# Altium PCB PCB2.PcbDoc
Units mil, origin at the board's own origin, x right, y up, seen from the top; angles counter-clockwise.
Board outline 2625 x 2375 mil, 2 copper layers (Top Layer, Bottom Layer); 14 components, 13 nets, 39 pads, 0 vias.
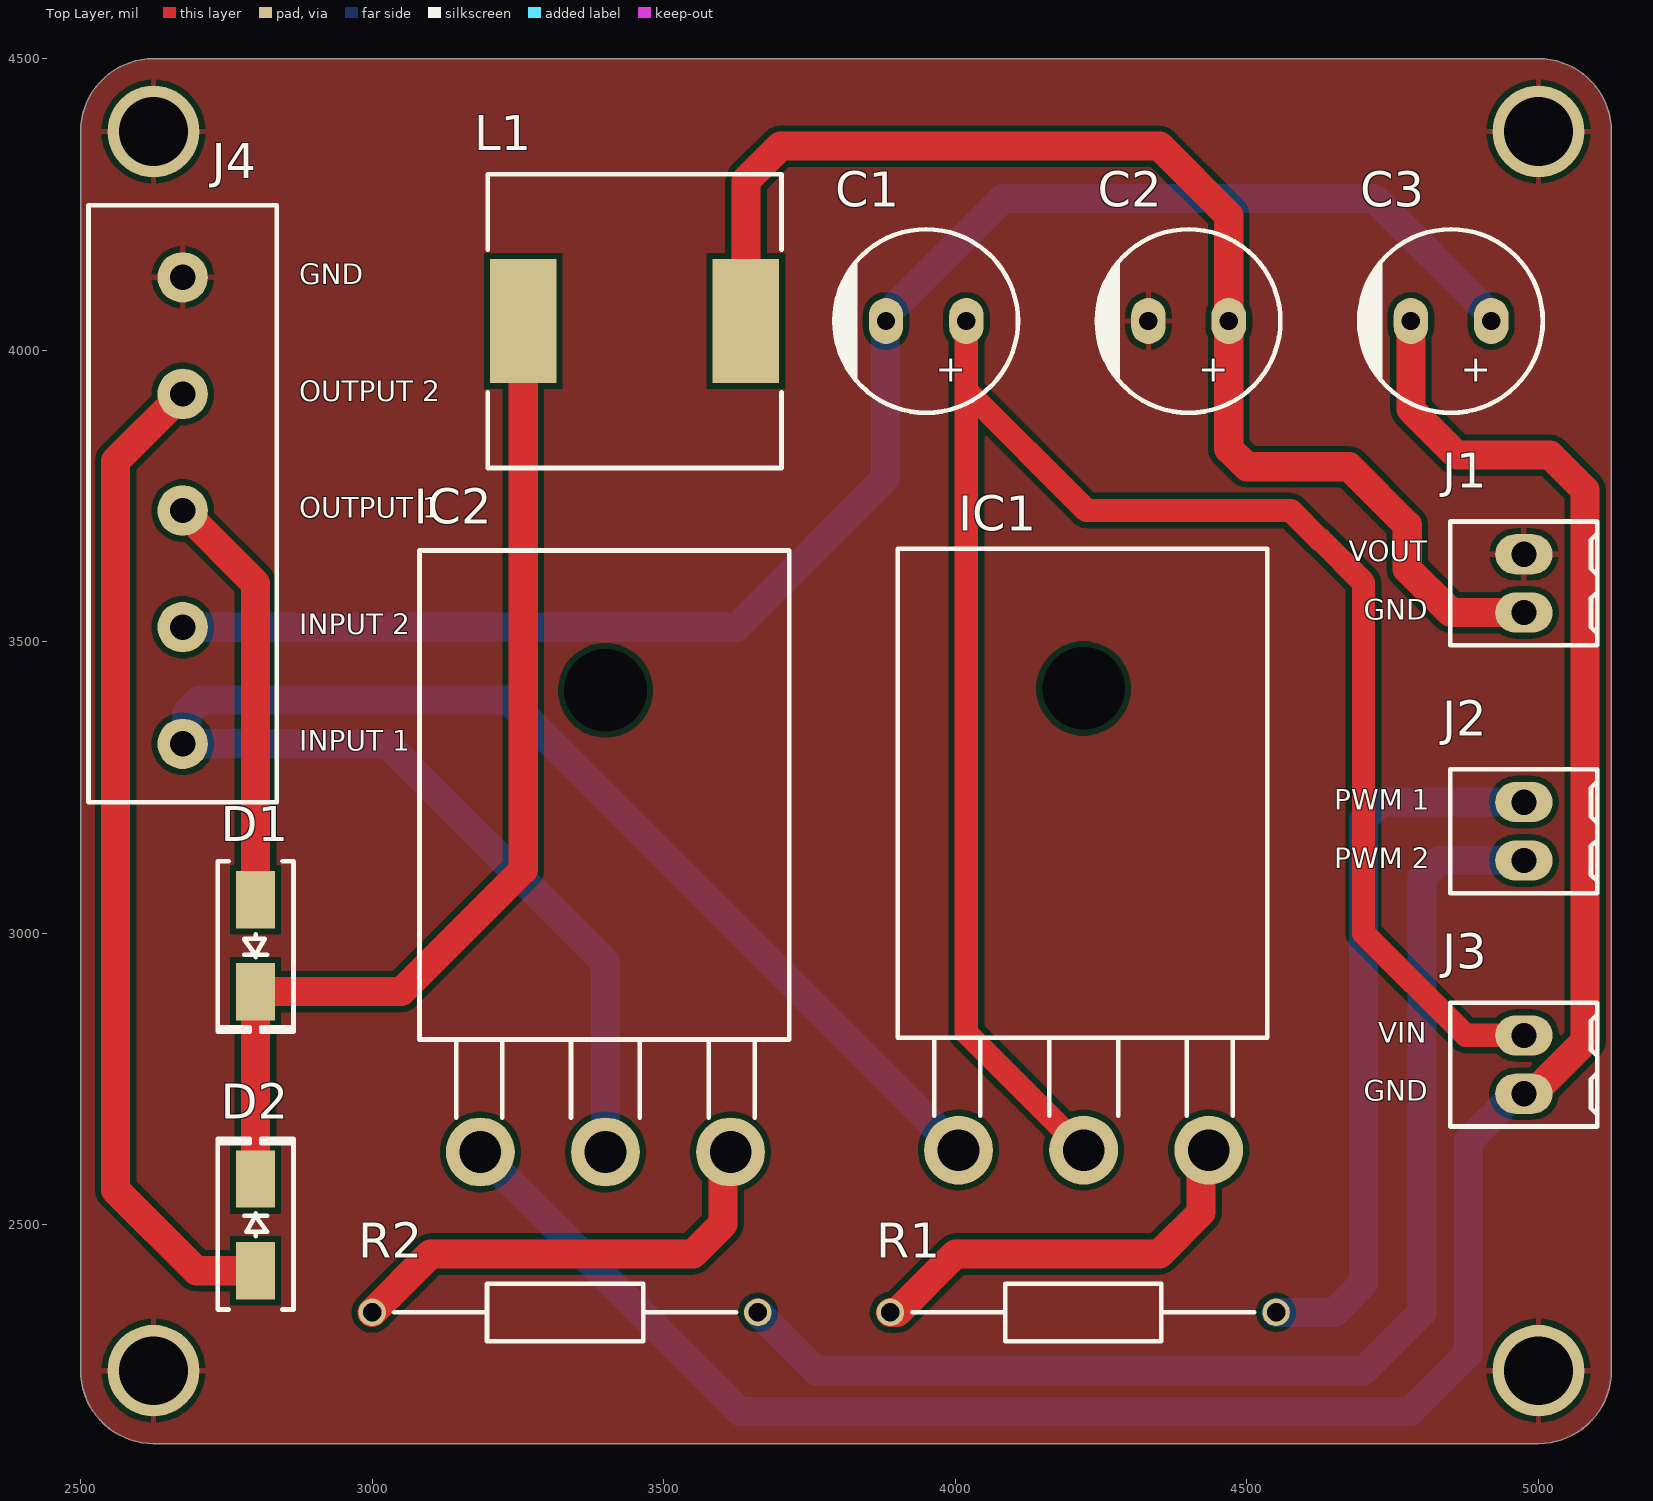
[diagram p0: Top Layer view]
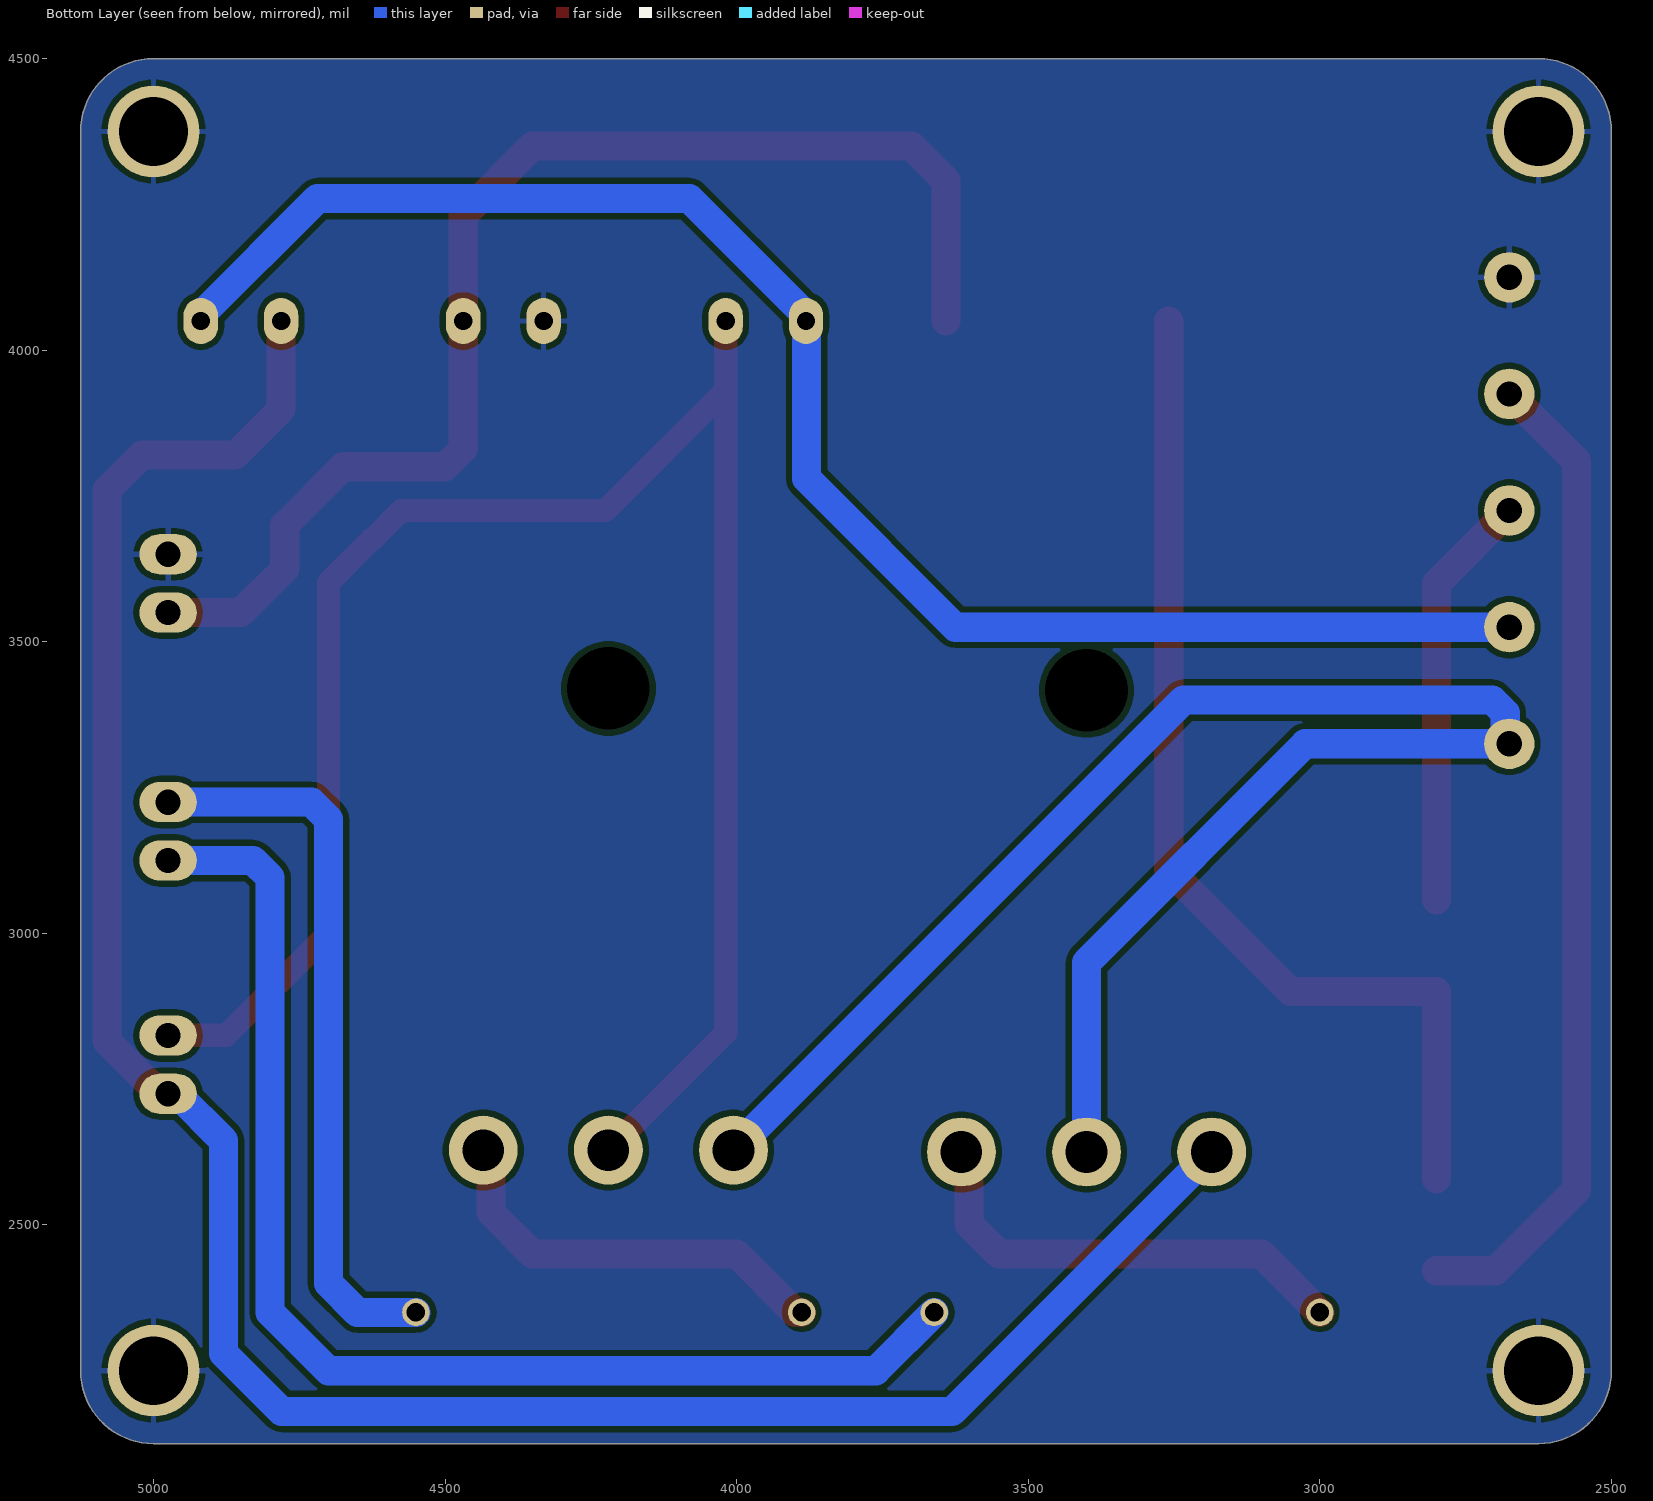
[diagram p1: Bottom Layer view, seen from below]
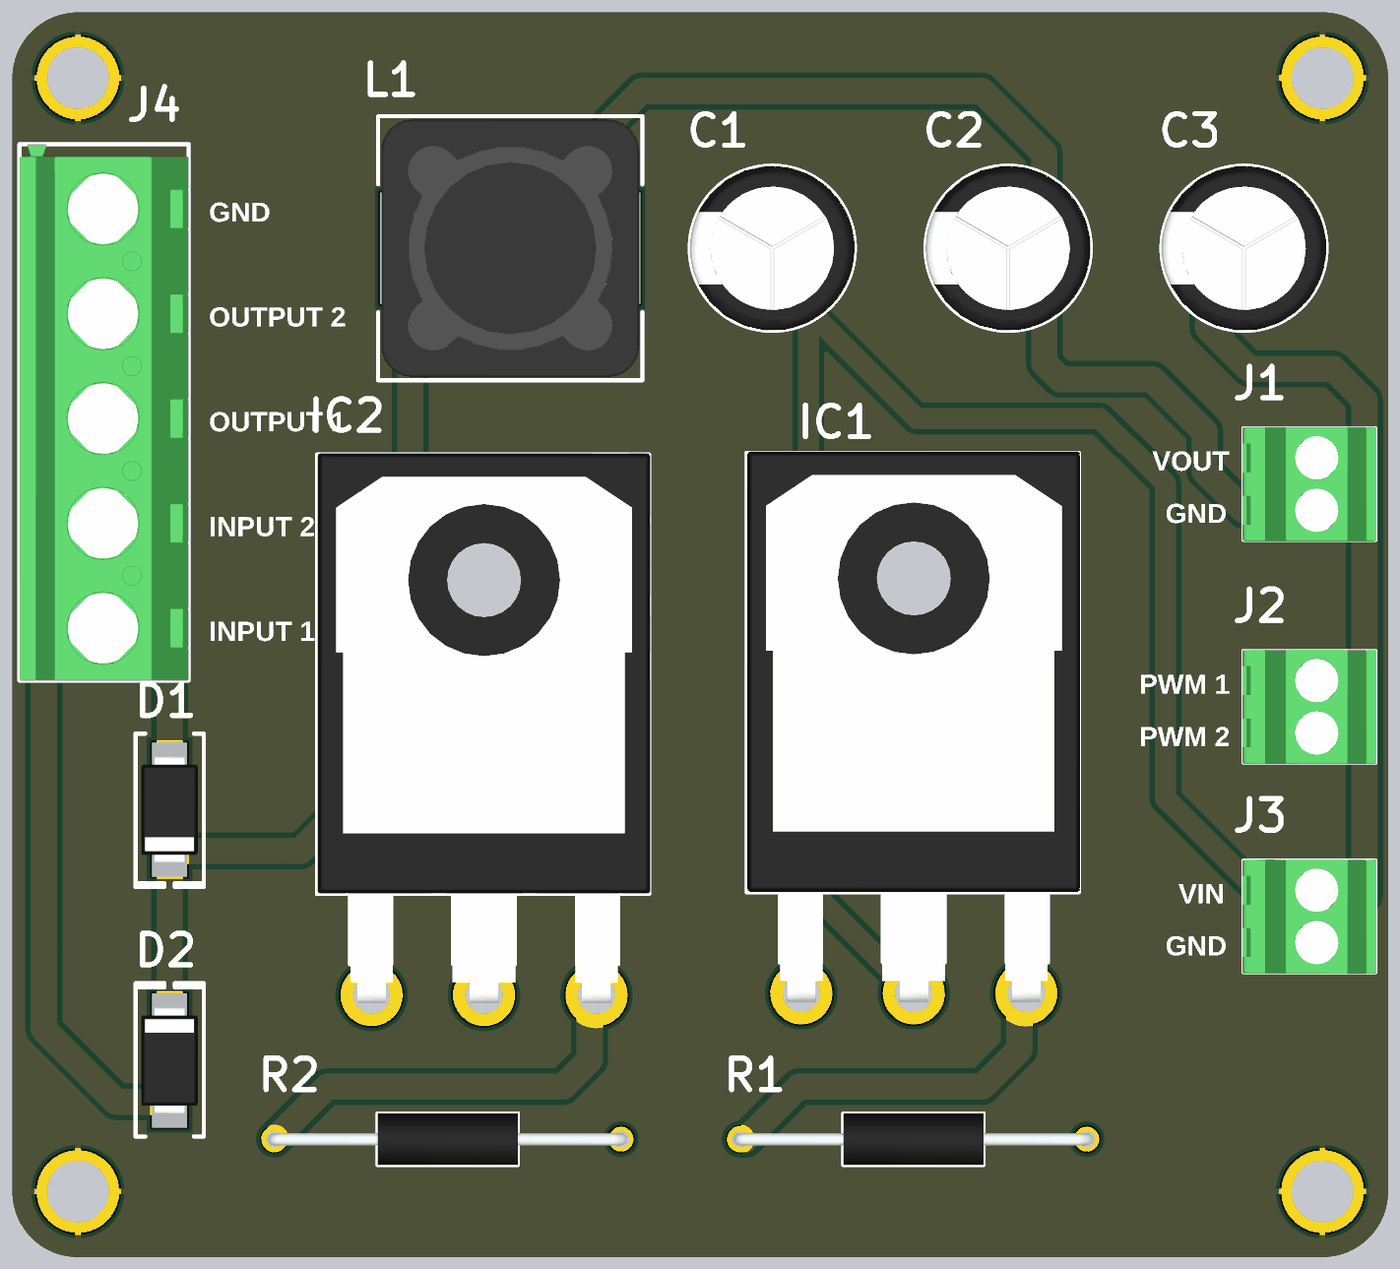
[diagram p2: 3D render of the assembled board from above, using the file's embedded part models]

## Layer stack, top to bottom
Top Solder: solder mask 0.4, Solder Resist, Dk 3.5
Top Layer: signal copper 1.4
Dielectric 1: dielectric 12.6, FR-4, Dk 4.8
Bottom Layer: signal copper 1.4
Bottom Solder: solder mask 0.4, Solder Resist, Dk 3.5

## Board outline
2500,2250 ccw(c2625,2250) 2625,2125 5000,2125 ccw(c5000,2250) 5125,2250 5125,4375 ccw(c5000,4375) 5000,4500 2625,4500 ccw(c2625,4375) 2500,4375

## Design rules (kind name [scope] priority, off if disabled: settings)
Clearance [All] p1: gap=10 ignorepadtopadclearanceinfootprint=FALSE except(0: Arc-Hole Track-Hole SMDPad-Hole THPad-Hole Via-Hole Fill-Hole Poly-Hole Region-Hole Text-Hole)
PolygonConnect [All] p1: connectstyle=Relief reliefconductorwidth=10 reliefentries=4 polygonreliefangle="90 Angle" airgapwidth=10
RoutingVias [All] p1: holewidth=28 width=50 viastyle="Through Hole" minholewidth=28 minwidth=50 maxholewidth=28 maxwidth=50
SolderMaskExpansion [All] p1: expansion=4 istentingtop=FALSE
Width [All] p1: maxlimit=50 minlimit=10 preferedwidth=10
30 further rules are at their usual default settings.

## Components (designator, comment, footprint, x,y, rotation, side; value= is the part's Value field where it differs from the comment)
C1 "100 µF" "CAP AL TH D8 L3.5 H12.5" 3950,4050 r180 top
C2 "100 µF" "CAP AL TH D8 L3.5 H12.5" 4400,4050 r180 top
C3 "100 µF" "CAP AL TH D8 L3.5 H12.5" 4850,4050 r180 top
D1 "SBR2A40SA-13" "DO214AC SMA" 2800,2978.74 r270 top
D2 "SBR2A40SA-13" "DO214AC SMA" 2800,2500 r90 top
IC1 "IXFH90N65X3" "IXYS TO-247 IXFH FLAT" 4220,2628.27 r0 top
IC2 "IXFH90N65X3" "IXYS TO-247 IXFH FLAT" 3400,2625 r0 top
J1 "282834-2" "TE 282834-2" 4975,3600 r270 top
J2 "282834-2" "TE 282834-2" 4975,3175 r270 top
J3 "282834-2" "TE 282834-2" 4975,2775 r270 top
J4 "282837-5" "TE 282837-5" 2675,3725 r90 top
L1 "100uH" "BOURNS SRR1280" 3450,4050 r0 top value="270 µH"
R1 "10R" RESAD1680W59L680D250 4550,2350 r180 top
R2 "10R" RESAD1680W59L680D250 3661.42,2350 r180 top

## Footprints (in the part's own frame and the unit in brackets; to place one, negate y for a bottom-side part, rotate by r counter-clockwise, add the part's x,y. Pads: shape width x height; smd on the part's side, far side on the other; paste and mask are expansions set on the pad)
"BOURNS SRR1280" [mm] "Precision Wire Wound Inductor, 2-Leads, Body 12.50x12.50mm, IPC Medium Density"
  rect 2.9x5.4 smd: 1(-4.85,0) 2(4.85,0)
  silkscreen extent -6.4,-6.4 6.4,6.4, body extent -6.25,-6.25 6.25,6.25, height 7.9
"CAP AL TH D8 L3.5 H12.5" [mm] "8MM Diameter, 3.5MM Lead Spacing Aluminium Capacitor"
  oval 1.5x2 hole 0.8: 1(-1.75,0) 2(1.75,0)
  silkscreen extent -4,-4 4,4, body extent -4,-4 4,4, height 11.5
"DO214AC SMA" [mm] "Molded Diode, 2-Leads, Body 4.30x2.60mm, IPC Medium Density"
  rect 2.5x1.7 smd: 1(-2,0) 2(2,0)
  silkscreen extent -3.68,-1.65 3.75,1.65, body extent -2.6,-1.37 2.6,1.37, height 2.4
"IXYS TO-247 IXFH FLAT" [mm] "IXYS TO-247 Face down on PCB"
  round 3 hole 1.812: D(0,0) G(5.45,0) S(-5.45,0)
  round 0 hole 3.6 unplated: M(0,20.11)
  silkscreen extent -8.1,1.5 8,26.2, body extent -8.07,-0.4 8.07,26.26, height 5.22
RESAD1680W59L680D250 [mm]
  round 1.2 hole 0.8: 1(0,0) 2(16.8,0)
  silkscreen extent 0.95,-1.25 15.85,1.25, body extent -0.3,-1.24 17.1,1.24, height 2.5
"TE 282834-2" [mm]
  oval 1.75x2.5 hole 1.1: 1(-1.27,0) 2(1.27,0)
  silkscreen extent -2.7,-3.2 2.7,3.2, body extent -2.77,-3.25 2.77,3.25, height 10
"TE 282837-5" [mm] "Wire to Board Terminal Block Horizontal with Board, 5 Postions, Body 26x8.2mm, Pitch 5.08mm"
  round 2.2 hole 1.1: 1(-10.16,0) 2(-5.08,0) 3(0,0) 4(5.08,0) 5(10.16,0)
  silkscreen extent -12.7,-4.1 13.3,4.1, body extent -12.7,-4.1 13.3,4.1, height 10.3

## Part data
C1 C2 C3: library part UKL1E101MPD1TD, "CAP ALUM 100UF 20% 25V RADIAL", Device Package="Radial, Can", Lifetime @ Temp.="2000 Hrs @ 85°C", manufacturer=Nichicon, Operating Temperature="-40°C ~ 85°C", Ripple Current @ High Frequency="420 mA @ 10 kHz", Ripple Current @ Low Frequency="280 mA @ 120 Hz", Supplier Part Number 1=493-10488-1-ND, Tolerance=±20%, Voltage - Rated="25 V", Applications="General Purpose", Capacitance="100 µF", componentlink1description=Datasheet, componentlink1url=http://nichicon-us.com/english/products/pdfs/e-ukl.pdf, componentlink2description="DigiKey Link", componentlink2url=https://www.digikey.com/en/products/detail/nichicon/UKL1E101MPD1TD/4317977, Height - Seated (Max)="0.492\" (12.50mm)", lastupdated="3.06.2024 20:06:12", Lead Spacing="0.138\" (3.50mm)", Lifecycle Status=Active, Minimum Order=1, Mounting Type="Through Hole", Package / Case="Radial, Can", packaging=TapeAndBox, Part Number=UKL1E101MPD1TD, Part Status=Active, partid=7210, Polarization=Polar, price=0.18, series=UKL, Size / Dimension="0.315\" Dia (8.00mm)", Supplier 1=DigiKey
D1 D2: "DIODE SBR 40V 2A SMA", Current - Average Rectified (Io)=2A, Current - Reverse Leakage @ Vr="500 µA @ 40 V", manufacturer="Diodes Incorporated", Operating Temperature - Junction="-65°C ~ 150°C", Package / Case="DO-214AC, SMA", Supplier Device Package=SMA, Supplier Part Number 1=SBR2A40SA-13DICT-ND, Voltage - DC Reverse (Vr) (Max)="40 V", Voltage - Forward (Vf) (Max) @ If="550 mV @ 2 A", componentlink1description=Datasheet, componentlink1url=https://www.diodes.com/assets/Datasheets/SBR2A40SA.pdf, componentlink2description="DigiKey Link", componentlink2url=https://www.digikey.com/en/products/detail/diodes-incorporated/SBR2A40SA-13/7725177, Diode Type="Super Barrier", lastupdated="3.06.2024 19:54:28", Lifecycle Status=Active, Minimum Order=1, Mounting Type="Surface Mount", packaging=TapeAndReel, Part Number=SBR2A40SA-13, Part Status=Active, partid=3438, price=0.13, series=SBR®, Speed="Standard Recovery >500ns, > 200mA (Io)", Supplier 1=DigiKey
IC1 IC2: "MOSFET 90A 650V X3 TO247", Current - Continuous Drain (Id) @ 25°C="90A (Tc)", Drain to Source Voltage (Vdss)="650 V", Drive Voltage (Max Rds On,  Min Rds On)=10V, manufacturer=IXYS, Operating Temperature="-55°C ~ 150°C (TJ)", Power Dissipation (Max)="960W (Tc)", Supplier Device Package="TO-247 (IXFH)", Supplier Part Number 1=238-IXFH90N65X3-ND, Input Capacitance (Ciss) (Max) @ Vds="6080 pF @ 25 V", componentlink2description="DigiKey Link", componentlink2url=https://www.digikey.com/en/products/detail/ixys/IXFH90N65X3/15776033, FET Type=N-Channel, Gate Charge (Qg) (Max) @ Vgs="95 nC @ 10 V", lastupdated="10.08.2022 04:39:14", Lifecycle Status=Active, Minimum Order=1, Mounting Type="Through Hole", packaging=Tube, Part Number=IXFH90N65X3, Part Status=Active, price=11.41, Rds On (Max) @ Id, Vgs="33mOhm @ 45A, 10V", series="HiPerFET™, Ultra X3", Supplier 1=DigiKey, Technology="MOSFET (Metal Oxide)", Vgs (Max)=±20V, Vgs(th) (Max) @ Id="5.2V @ 4mA"
J1 J2 J3: "TERM BLK 2P SIDE ENT 2.54MM PCB", Color=Green, Current=10A, manufacturer="TE Connectivity AMP Connectors", Supplier Part Number 1=A98333-ND, Voltage=150V, componentlink1description=Datasheet, componentlink1url=https://www.te.com/commerce/DocumentDelivery/DDEController?Action=srchrtrv&DocNm=282834&DocType=Customer+Drawing&DocLang=English, componentlink2description="DigiKey Link", componentlink2url=http://digikey.com/product-detail/en/te-connectivity-amp-connectors/282834-2/A98333-ND/1150135, lastupdated="15.01.2020 04:15:38", Lifecycle Status=Active, Mating Orientation="Horizontal with Board", Minimum Order=1, Mounting Type="Through Hole", Number of Levels=1, packaging=Bulk, Part Number=282834-2, Part Status=Active, Pitch="0.100\" (2.54mm)", Positions Per Level=2, price=0.88, series=Buchanan, Supplier 1=DigiKey, Wire Gauge="16-30 AWG", Wire Termination="Screw - Rising Cage Clamp"
J4: "TERM BLK 5P SIDE ENT 5.08MM PCB", Color=Green, Current=13.5A, manufacturer="TE Connectivity AMP Connectors", Supplier Part Number 1=282837-5-ND, Voltage=300V, componentlink1description=Datasheet, componentlink1url=https://www.te.com/commerce/DocumentDelivery/DDEController?Action=srchrtrv&DocNm=282837&DocType=Customer+Drawing&DocLang=English, componentlink2description="DigiKey Link", componentlink2url=http://digikey.com/product-detail/en/te-connectivity-amp-connectors/282837-5/282837-5-ND/2259492, Features="Interlocking (Side)", lastupdated="21.06.2022 15:01:10", Lifecycle Status=Active, Mating Orientation="Horizontal with Board", Minimum Order=1, Mounting Type="Through Hole", Number of Levels=1, packaging=Tray, Part Number=282837-5, Part Status=Active, Pitch="0.200\" (5.08mm)", Positions Per Level=5, price=1.77, series=Buchanan, Supplier 1=DigiKey, Wire Gauge="16-28 AWG", Wire Termination="Screw - Rising Cage Clamp"
L1: library part SRR1280-271K, "FIXED IND 270UH 1.2A 450MOHM SMD", Current - Saturation=1.6A, Current Rating (Amps)="1.2 A", DC Resistance (DCR)="450mOhm Max", Device Package=Nonstandard, Frequency - Self Resonant=3.1MHz, manufacturer="Bourns Inc.", Operating Temperature="-40°C ~ 125°C", Q @ Freq="20 @ 796kHz", Supplier Part Number 1=SRR1280-271KCT-ND, Tolerance=±10%, Inductance="270 µH", Inductance Frequency - Test="100 kHz", componentlink1description=Datasheet, componentlink1url=https://www.bourns.com/docs/Product-Datasheets/SRR1280.pdf, componentlink2description="DigiKey Link", componentlink2url=https://www.digikey.com/en/products/detail/bourns-inc/SRR1280-271K/1970009, Height - Seated (Max)="0.315\" (8.00mm)", lastupdated="3.06.2024 20:02:37", Lifecycle Status=Active, Material - Core=Ferrite, Minimum Order=1, Mounting Type="Surface Mount", Package / Case=Nonstandard, packaging=TapeAndReel, Part Number=SRR1280-271K, Part Status=Active, partid=13, price=0.51, series=SRR1280, Shielding=Shielded, Size / Dimension="0.492\" L x 0.492\" W (12.50mm x 12.50mm)", Supplier 1=DigiKey, Type="Drum Core, Wirewound"
R1 R2: library part CFR0W4J0300A50, "Resistor", Manufacturer_Name=ROYALOHM, Datasheet Link=https://www.tme.eu/Document/3181dd48312689b59bff6130e2889fcb/CarbonFilm.pdf, Manufacturer_Part_Number=CFR0W4J0300A50

## Free pads (board coordinates)
  round 157.48 hole 118.11: ""(2625,2250) ""(2625,4375) ""(5000,2250) ""(5000,4375)

## Nets (pads, with @x,y where several pads share a name; then routed paths per layer and width w, separated by ;. In a path a pad name is that pad's centre, name@x,y a point inside that pad or via, vN(x,y) a via of type N, cw(c..) or ccw(c..) an arc to the next point about the centre after c; other vN are vias at no path point)
GND: C2.2 J1.1 J4.5 pad.
NetC1_1: C1.1 IC1.D J3.1 | length 3271.7
  Top Layer w40: C1.1 4018.9,3931.1 ; IC1.D 4018.9,2829.37 4018.9,3931.1 ; J3.1 4875,2825 4700,3000 4700,3601.57 4626.57,3675 4625,3675 4575,3725 4225,3725 4018.9,3931.1
NetC2_1: C2.1 J1.2 L1.2 | length 2209.1
  Top Layer w50: L1.2 3640.94,4290.94 3700,4350 4350,4350 4468.9,4231.1 C2.1 4468.9,3831.1 4500,3800 4675,3800 4775,3700 4775,3625 4850,3550 J1.2
NetC3_2: C3.2 IC2.S J3.2 | length 4008
  Top Layer w50: C3.2 4781.1,3898.9 4860,3820 5020,3820 5080,3760 5080,2815.24 4989.76,2725 J3.2
  Bottom Layer w50: IC2.S 3630.43,2180 4780,2180 4880,2280 4880,2644.76 4960.24,2725 J3.2
NetD1_2: D1.2 D2.2 L1.1 | length 1807.9
  Top Layer w50: D2.2 D1.2 3050,2900 3259.06,3109.06 L1.1
NetJ2_1: J2.1 R1.1 | length 1253.6
  Bottom Layer w50: R1.1 4650,2350 4700,2400 4700,3195.71 4729.29,3225 J2.1
NetJ2_2: J2.2 R2.1 | length 2154.3
  Bottom Layer w50: R2.1 3761.42,2250 4700,2250 4800,2350 4800,3095.71 4829.29,3125 J2.2
NetR1_2: IC1.G R1.2 | length 716.1
  Top Layer w50: R1.2 3900,2350 4000,2450 4350,2450 4421.53,2521.53 4421.53,2615.24 IC1.G
NetR2_2: IC2.G R2.2 | length 793.2
  Top Layer w50: R2.2 3100,2450 3550,2450 3601.53,2501.53 3601.53,2611.97 IC2.G
T1Input1: IC1.S IC2.D J4.1 | length 2931.7
  Top Layer w50: IC2.D@3386.97,2638.03 IC2.D
  Bottom Layer w50: IC2.D 3400,2950 3025,3325 J4.1 2682.01,3332.01 2682.01,3377.72 2704.29,3400 3233.7,3400 IC1.S
T1Input2: C1.2 C3.1 J4.2 | length 2804.4
  Bottom Layer w50: J4.2 3625,3525 3880,3780 3880,4048.9 C1.2 3881.1,4059.84 4081.26,4260 4718.74,4260 4918.9,4059.84 C3.1
T1Output1: D1.1 J4.3 | length 719.3
  Top Layer w50: J4.3 2800,3600 D1.1
T1Output2: D2.1 J4.4 | length 1710.1
  Top Layer w50: J4.4 2560,3810 2560,2560 2698.74,2421.26 D2.1
pads on no net: IC1.M IC2.M

## Polygon pours and split planes (outlines as drawn)
GND on Top Layer "GND" (solid, remove dead copper, pour order 0): 2500,2250 ccw(c2625,2250) 2625,2125 5000,2125 ccw(c5000,2250) 5125,2250 5125,4375 ccw(c5000,4375) 5000,4500 2625,4500 ccw(c2625,4375) 2500,4375
GND on Bottom Layer "GND_L02_P001" (solid, remove dead copper, pour order 1): 2500,2250 ccw(c2625,2250) 2625,2125 5000,2125 ccw(c5000,2250) 5125,2250 5125,4375 ccw(c5000,4375) 5000,4500 2625,4500 ccw(c2625,4375) 2500,4375

## Silkscreen, mask and mechanical layers (free items; w line width, h text height)
Top Overlay:
  text "GND" at 2875,4100.72 h60
  text "OUTPUT 2" at 2875,3900.72 h60
  text "OUTPUT 1" at 2875,3700.72 h60
  text "VOUT" at 4675,3625.72 h60
  text "GND" at 4700,3525.72 h60
  text "INPUT 2" at 2875,3500.72 h60
  text "INPUT 1" at 2875,3300.72 h60
  text "PWM 1" at 4650,3200 h60
  text "PWM 2" at 4650,3100 h60
  text "VIN" at 4725,2800 h60
  text "GND" at 4700,2700.72 h60

## Text inside footprints (layer, text, board x,y; h text height)
C1: Top Overlay "+" at 4018.9,4000.79 h78.74 r180
C2: Top Overlay "+" at 4468.9,4000.79 h78.74 r180
C3: Top Overlay "+" at 4918.9,4000.79 h78.74 r180